# EAGLE board gate (EAGLE 7.6.0)
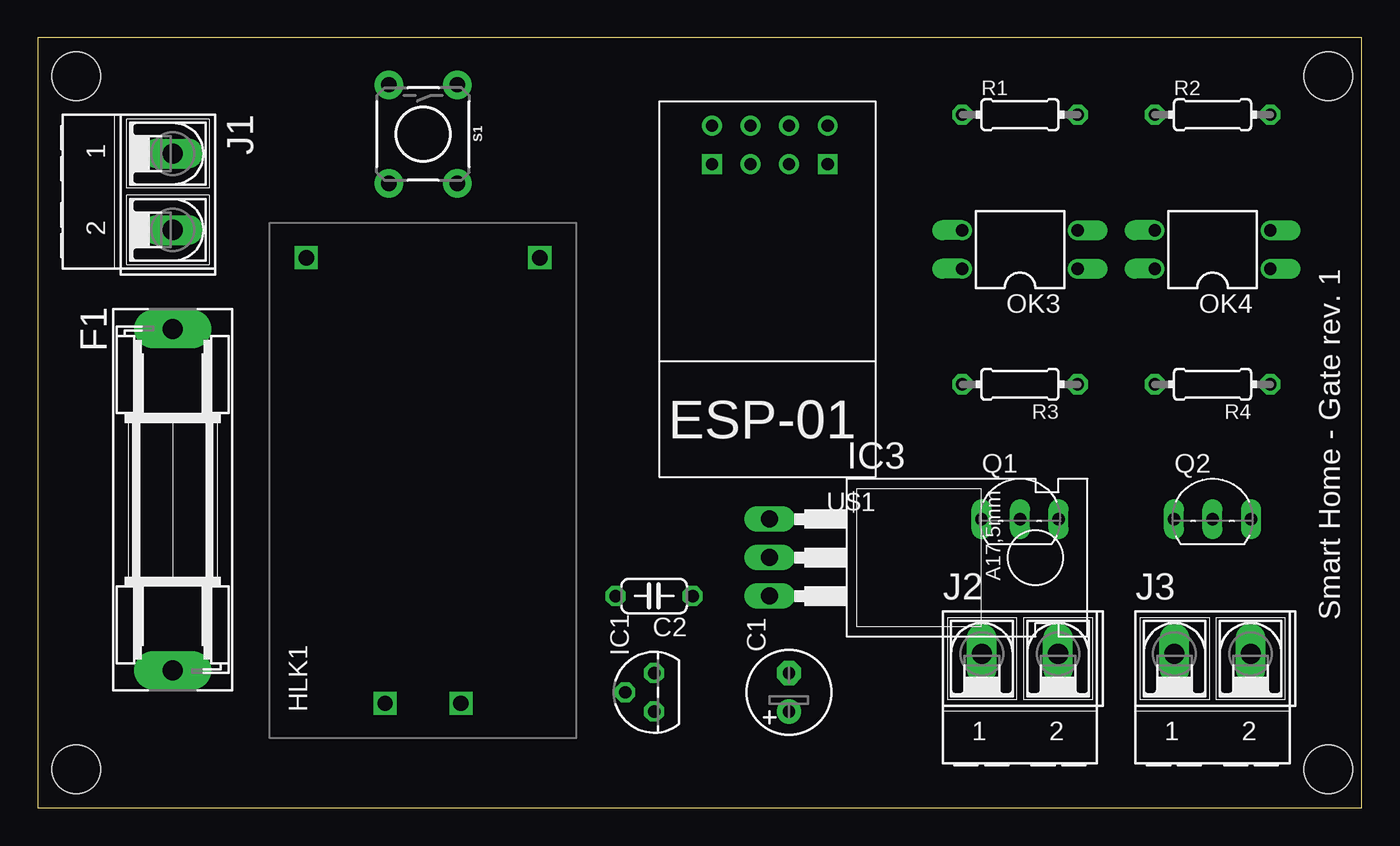
[diagram p0: board, top side]
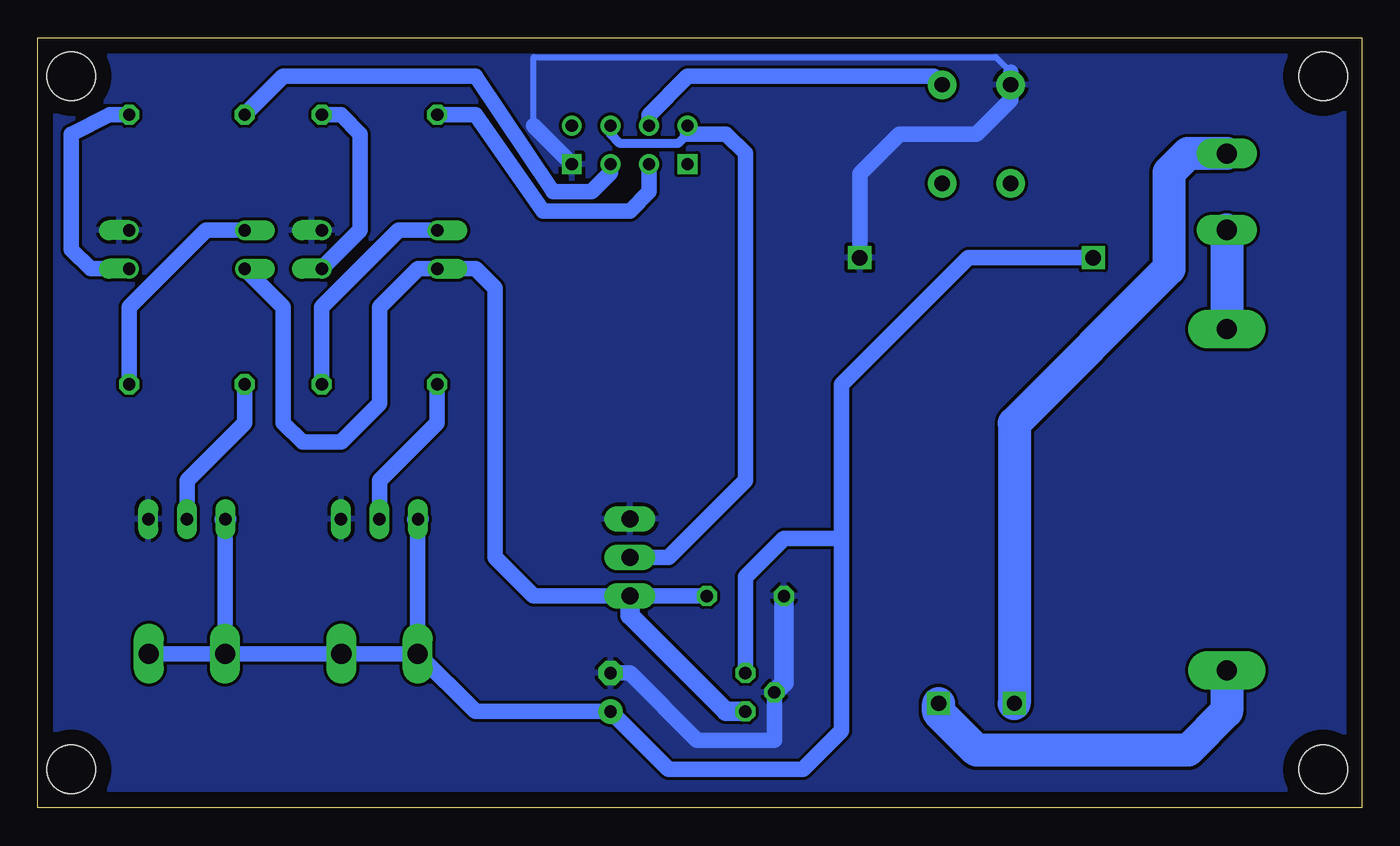
[diagram p1: board, bottom side, seen from below]

Size 87.3 x 50.79 mm. Coordinates in mm from the lower left corner, seen from the top.
Outline: 0,0 87.3,0 87.3,50.79 0,50.79 0,0
Copper layers (1*16): Top 0.035mm / dielectric 1.5mm / Bottom 0.035mm
Design rules "default": minimum track width 10mil, minimum drill 24mil, track to track 8mil, track to pad 8mil, pad to pad 8mil, via to via 8mil, smd to smd 8mil, copper to edge 40mil, drill to drill 8mil, minimum pad ring 10mil, minimum via ring 8mil, stop-mask expansion 4mil, vias tented up to drill 0mil, thermal gap 10mil
Holes 3.2 mm at 2.54,48.26 2.54,2.54 85.09,2.54 85.09,48.26

## Footprints (pad centres in the part's own frame; a part is rotated, then mirrored left to right if it is on the bottom)
E2,5-6 = drill 0.813 pad 1.6: + -1.27,0 | drill 0.813 pad 1.6 octagon: - 1.27,0
C050-024X044 = drill 0.813 octagon: 1 -2.54,0; 2 2.54,0
SH22,5 = drill 1.321 pad 2.54 long: 1 -11.252,0; 2 11.252,0
HLK-PM01 = drill 1.016 square: P$1 -14.7,2.5; P$2 -14.7,-2.5; P$3 14.7,7.7; P$4 14.7,-7.7
TO92 = drill 0.813 octagon: 1 -1.27,0; 2 0,1.905; 3 1.27,0
TO220 = drill 1.118 long: 1 -2.54,-6.35; 2 0,-6.35; 3 2.54,-6.35
AK500/2-H = drill 1.321 long: 1 -2.515,0; 2 2.515,0
DIL04 = drill 0.813 offset: 1 -1.27,-3.81; 2 1.27,-3.81; 3 1.27,3.81; 4 -1.27,3.81
TO92-EBC = drill 0.813 long: B 0,-1.27; C -2.54,-1.27; E 2.54,-1.27
0204/7 = drill 0.813 octagon: 1 -3.81,0; 2 3.81,0
TACTILE_SWITCH_PTH_6.0MM = drill 1.016 pad 1.88: 1 -3.251,2.261; 2 3.251,2.261; 3 -3.251,-2.261; 4 3.251,-2.261
ESP01 = drill 0.8: CH_PD -1.285,-8.178; GPIO0 1.255,-5.638; GPIO2 -1.285,-5.638; RST 1.255,-8.178; TX -3.825,-8.178; VCC 3.795,-8.178 | drill 0.8 square: GND -3.825,-5.638; RX 3.795,-5.638

## Placement (x,y rotation side)
C1  330nF  [E2,5-6]  49.53,7.62 90 top
C2  100nF  [C050-024X044]  40.64,13.97 180 top
F1  FUSESH22,5  [SH22,5]  8.89,20.32 270 top
HLK1  HLK-PM013W  [HLK-PM01]  25.4,21.59 90 top
IC1  7805L  [TO92]  40.64,7.62 90 top
IC3  LM1117T-1.8  [TO220]  54.61,16.51 270 top
J1  [AK500/2-H]  8.89,40.64 270 top
J2  [AK500/2-H]  64.77,10.16 0 top
J3  [AK500/2-H]  77.47,10.16 0 top
OK3  PC817  [DIL04]  64.77,36.83 90 top
OK4  PC817  [DIL04]  77.47,36.83 90 top
Q1  BC548  [TO92-EBC]  64.77,20.32 0 top
Q2  BC548  [TO92-EBC]  77.47,20.32 0 top
R1  220  [0204/7]  64.77,45.72 0 top
R2  220  [0204/7]  77.47,45.72 0 top
R3  1k  [0204/7]  64.77,27.94 180 top
R4  1k  [0204/7]  77.47,27.94 180 top
S1  MOMENTARY-SWITCH-SPST-PTH-6.0MM  [TACTILE_SWITCH_PTH_6.0MM]  25.4,44.45 270 top
U$1  ESP01  [ESP01]  48.26,36.83 180 top

## Library data of the parts
C1 C2 = rcl
F1 = fuse; OC_FARNELL: unknown; OC_NEWARK: unknown
HLK1 = HLK-PM01
IC1 = linear
IC3 = lm1117
J1-J3 = con-ptr500; OC_FARNELL: unknown; OC_NEWARK: unknown
OK3 OK4 = optocoupler; MPN: PC817X4J000F; OC_FARNELL: 9707727; OC_NEWARK: 97K7059
Q1 Q2 = transistor-npn
R1-R4 = resistor
S1 = SparkFun-Switches; PROD_ID: SWCH-08441; SF_SKU: COM-00097
U$1 = esp8266modules

## Nets
5V: C2.1 IC1.1 IC3.3 OK3.4 OK4.4
12V: C1.+ HLK1.P$3 IC1.3 J2.1 J2.2 J3.1 J3.2 Q1.C Q2.C
GND: C1.- C2.2 HLK1.P$4 IC1.2 IC3.1 OK3.2 OK4.2 Q1.E Q2.E S1.3 U$1.GND
N$1: HLK1.P$1 J1.1
N$2: F1.1 J1.2
N$3: F1.2 HLK1.P$2
N$4: OK3.1 R1.2
N$5: OK4.1 R2.2
N$6: Q1.B R3.2
N$7: Q2.B R4.2
N$8: OK4.3 R4.1
N$9: OK3.3 R3.1
N$10: S1.1 U$1.RST
N$12: R2.1 U$1.GPIO2
N$13: R1.1 U$1.GPIO0
N$14: IC3.2 U$1.CH_PD U$1.VCC

## Tracks (layer width: path | path; a pad name or v marks a point on that pad's centre or on a via)
5V
  Bottom 1.016: C2.1 IC3.3 54.61,13.97 57.15,16.51 57.15,34.29 58.42,35.56 OK3.4 62.23,35.56 64.77,33.02 64.77,26.67 67.31,24.13 69.85,24.13 71.12,25.4 71.12,33.02 OK4.4
  Bottom 1.27: IC1.1 41.91,6.35 48.26,12.7 IC3.3
12V
  Bottom 1.016: HLK1.P$3 25.94,36.29 34.29,27.94 34.29,17.78 | 34.29,17.78 34.29,5.08 36.83,2.54 45.72,2.54 C1.+ 58.45,6.35 J2.1 | J2.1 62.26,19.02 | J2.1 J2.2 J3.1 | J3.1 J3.2 | J3.1 74.95,19.02 | IC1.3 40.64,15.24 38.1,17.78 34.29,17.78
  Bottom 1.422: 62.26,19.02 Q1.C | 74.95,19.02 Q2.C
GND
  Bottom 0.406: 54.61,44.99 54.61,49.53 24.13,49.53 23.14,48.54
  Bottom 1.016: HLK1.P$4 33.1,41.83 30.48,44.45 25.4,44.45 23.14,46.71 S1.3 23.14,48.54 | C1.- 48.26,8.89 43.81,4.45 38.73,4.45 IC1.2 | U$1.GND 54.61,44.99
  Bottom 1.27: IC1.2 38.1,8.26 C2.2
  pour Bottom: 0,50.8 87.63,50.8 87.63,0 0,0
N$1
  Bottom 2.184: J1.1 11.46,43.16 12.7,41.91 12.7,35.56 22.9,25.36 HLK1.P$1
N$2
  Bottom 2.184: J1.2 F1.1
N$3
  Bottom 2.184: F1.2 8.89,6.35 11.43,3.81 25.4,3.81 27.9,6.31 HLK1.P$2
N$4
  Bottom 1.016: OK3.1 66.04,38.1 66.04,44.45 67.31,45.72 R1.2
N$5
  Bottom 1.016: R2.2 82.55,45.72 85.09,44.45 85.09,36.83 83.82,35.56 OK4.1
N$6
  Bottom 1.016: Q1.B 64.77,21.59 60.96,25.4 R3.2
N$7
  Bottom 1.016: R4.2 73.66,25.4 77.47,21.59 Q2.B
N$8
  Bottom 1.016: R4.1 81.28,33.02 76.2,38.1 OK4.3
N$9
  Bottom 1.016: R3.1 68.58,33.02 63.5,38.1 OK3.3
N$10
  Bottom 1.016: S1.1 28.22,48.26 44.45,48.26 47.01,45.7 U$1.RST
N$12
  Bottom 1.016: R2.1 71.12,48.26 58.42,48.26 53.34,40.64 50.8,40.64 49.53,41.91 49.55,41.92 U$1.GPIO2
N$13
  Bottom 1.016: R1.1 58.42,45.72 53.98,39.37 48.26,39.37 46.99,40.64 46.99,41.91 47.01,41.92 U$1.GPIO0
N$14
  Bottom 0.61: U$1.VCC 44.47,44.44 45.09,43.81 48.9,43.81 49.55,44.47 U$1.CH_PD
  Bottom 1.016: IC3.2 45.72,16.51 40.64,21.59 40.64,43.18 41.91,44.45 44.45,44.45 44.47,44.47 U$1.VCC

## Text on the board
tPlace: Smart Home - Gate rev. 1